# EAGLE board dog tracker rev1 (EAGLE 9.6.2)
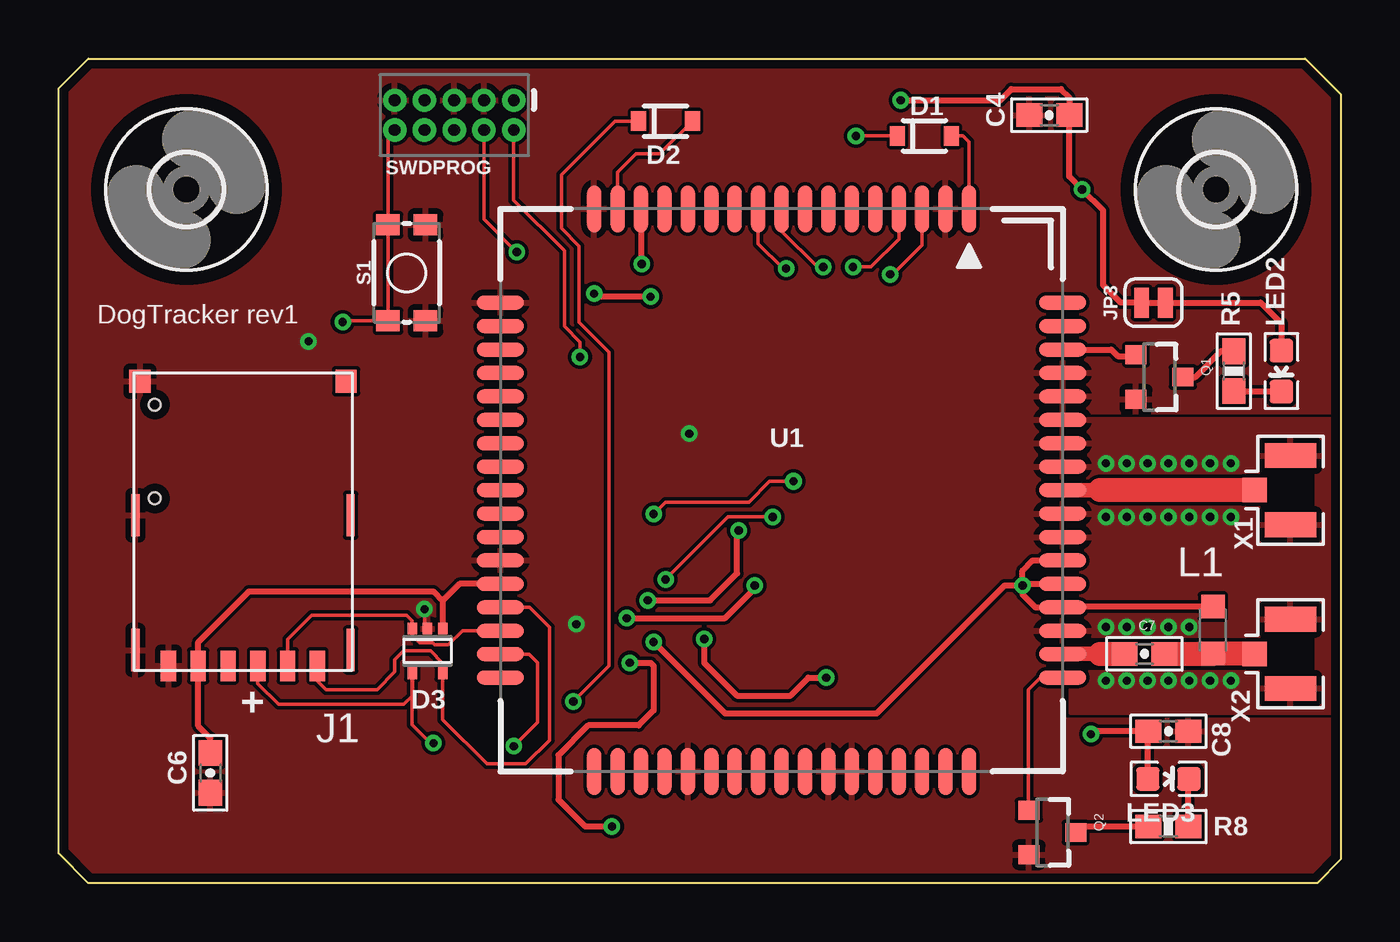
[diagram p0: board, top side]
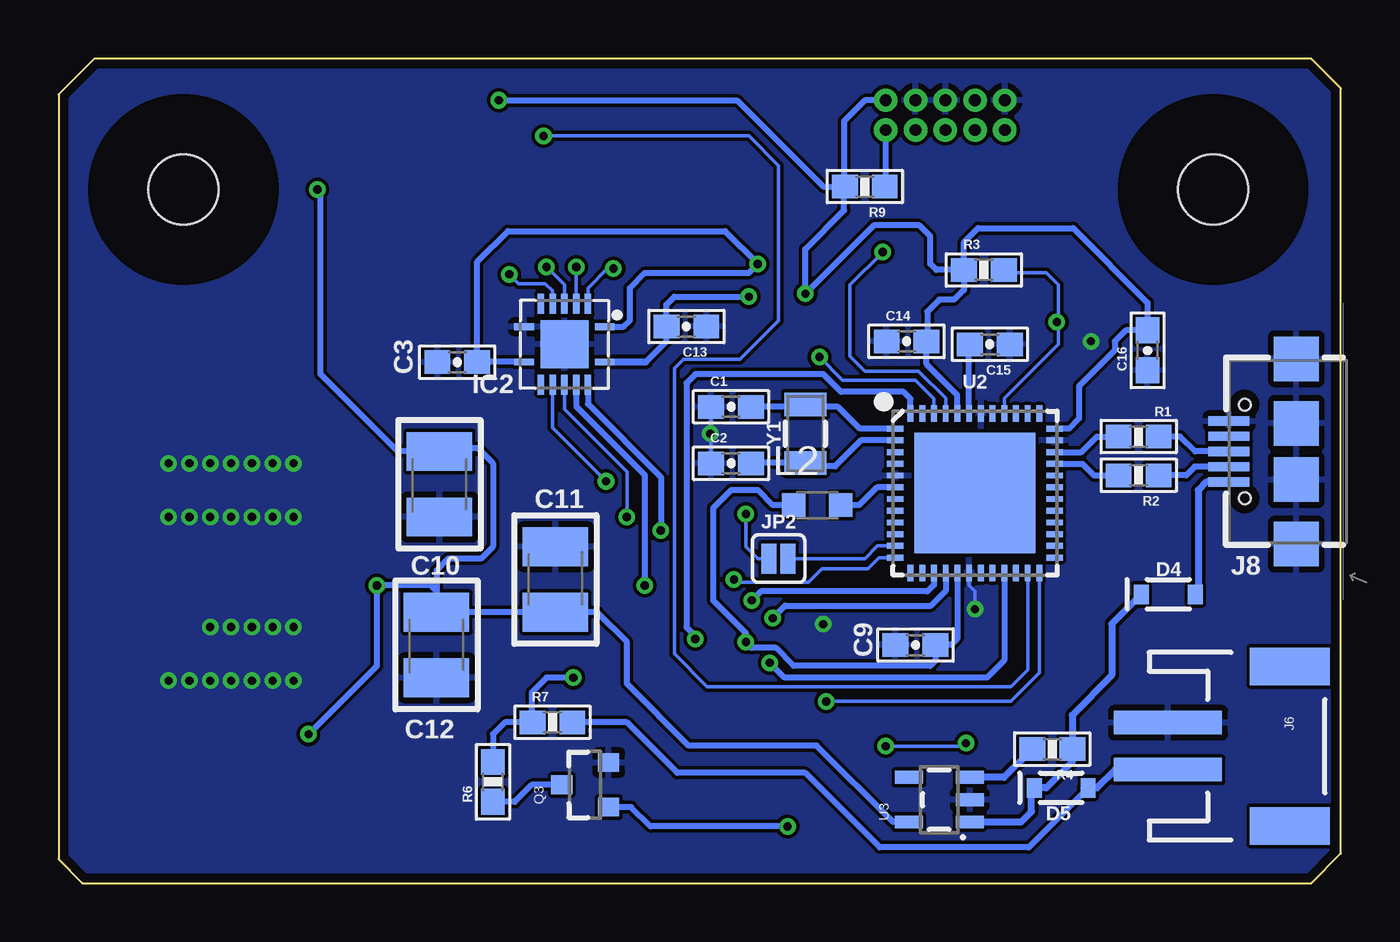
[diagram p1: board, bottom side, seen from below]

Size 54.74 x 35.18 mm. Coordinates in mm from the lower left corner, seen from the top.
Outline: 0,1.27 0,33.91 1.27,35.18 53.21,35.18 54.74,33.65 54.74,1.02 53.72,0 1.27,0 0,1.27
Copper layers (1*16): Top 0.0356mm / dielectric 1.5011mm / Bottom 0.0356mm
Design rules "oshpark-2layer *": minimum track width 6mil, minimum drill 13mil, track to track 6mil, track to pad 6mil, pad to pad 6mil, via to via 6mil, smd to smd 6mil, copper to edge 15mil, drill to drill 6mil, minimum pad ring 7mil, minimum via ring 7mil, stop-mask expansion 2.5mil, vias tented up to drill 0mil, thermal gap 10mil
Net classes: 1 power: width 0.406 mm

## Footprints (pad centres in the part's own frame; a part is rotated, then mirrored left to right if it is on the bottom)
0603-CAP-MARKED = smd 1.1 x 1: 1 -0.85,0; 2 0.85,0
1210 = smd 1.651 x 2.794: 1 -1.397,0; 2 1.397,0
SOD-323 = smd 0.63 x 0.83: A 1.15,0; C -1.15,0
SOT-353 = smd 0.4 x 0.5: 1 -0.65,-0.95; 2 0,-0.95; 3 0.65,-0.95; 4 0.65,0.95; 5 -0.65,0.95
3,0 = hole 3: 0,0
VQFN-14 = smd 0.85 x 0.28: 1 -1.725,-0.75; 7 1.725,-0.75; 8 1.725,0.75; 14 -1.725,0.75 | smd 0.28 x 0.85: 2 -1,-1.725; 3 -0.5,-1.725; 4 0,-1.725; 5 0.5,-1.725; 6 1,-1.725; 9 1,1.725; 10 0.5,1.725; 11 0,1.725; 12 -0.5,1.725; 13 -1,1.725 | smd 2.05 x 2.05: PAD 0,0
693043020611 = smd 0.65 x 1.3: C1 1.91,0; C2 -0.63,0; C3 -1.9,0; C5 3.18,0; C6 0.64,0; C7 -3.17,0 | smd 0.9 x 1: Z1 4.4,-12.14; Z6 -4.4,-12.14 | smd 0.35 x 1.8: Z2 4.595,-6.42; Z3 4.595,-0.67; Z4 -4.596,-0.67; Z5 -4.596,-6.42
JST-2-SMD = smd 1 x 4.6: 1 -1,-3.7; 2 1,-3.7 | smd 1.6 x 3.4: NC1 -3.4,1.5; NC2 3.4,1.5
USB-B-MICRO-SMD = smd 1.75 x 0.4: D+ 2.875,0; D- 2.875,0.65; GND 2.875,-1.3; ID 2.875,-0.65; VBUS 2.875,1.3 | smd 1.9 x 1.9: SHIELD1 0,3.95; SHIELD2 0,-3.95; SHIELD3 0,1.2; SHIELD4 0,-1.2 | hole 0.5: 2.2,2; 2.2,-2
SMT-JUMPER_2_NO_SILK = smd 0.635 x 1.27: 1 -0.406,0; 2 0.406,0
SMT-JUMPER_2_NC_TRACE_SILK = smd 0.635 x 1.27: 1 -0.508,0; 2 0.508,0
L2012C = smd 1 x 1: 1 -1,0; 2 1,0
LED-0603-MARKED = smd 1 x 1: A -0.877,0; C 0.877,0
SOT23-3 = smd 0.8 x 0.9: 1 -0.95,-1; 2 0.95,-1; 3 0,1
0603-RES-MARKED = smd 1.1 x 1: 1 -0.85,0; 2 0.85,0
TACTILE_SWITCH_SMD_4.6X2.8MM = smd 0.9 x 1: 1 -2.05,-0.8; 2 2.05,-0.8; 3 2.05,0.8; 4 -2.05,0.8
2X5-PTH-1.27MM = drill 0.508 pad 1: 1 -2.54,-0.635; 2 -2.54,0.635; 3 -1.27,-0.635; 4 -1.27,0.635; 5 0,-0.635; 6 0,0.635; 7 1.27,-0.635; 8 1.27,0.635; 9 2.54,-0.635; 10 2.54,0.635
SIM7000 = smd 2 x 0.6: 1 -12,8; 2 -12,7; 3 -12,6; 4 -12,5; 5 -12,4; 6 -12,3; 7 -12,2; 8 -12,1; 9 -12,0; 10 -12,-1; 11 -12,-2; 12 -12,-3; 13 -12,-4; 14 -12,-5; 15 -12,-6; 16 -12,-7; 17 -12,-8; 35 12,-8; 36 12,-7; 37 12,-6; 38 12,-5; 39 12,-4; 40 12,-3; 41 12,-2; 42 12,-1; 43 12,0; 44 12,1; 45 12,2; 46 12,3; 47 12,4; 48 12,5; 49 12,6; 50 12,7; 51 12,8 | smd 0.6 x 2: 18 -8,-12; 19 -7,-12; 20 -6,-12; 21 -5,-12; 22 -4,-12; 23 -3,-12; 24 -2,-12; 25 -1,-12; 26 0,-12; 27 1,-12; 28 2,-12; 29 3,-12; 30 4,-12; 31 5,-12; 32 6,-12; 33 7,-12; 34 8,-12; 52 8,12; 53 7,12; 54 6,12; 55 5,12; 56 4,12; 57 3,12; 58 2,12; 59 1,12; 60 0,12; 61 -1,12; 62 -2,12; 63 -3,12; 64 -4,12; 65 -5,12; 66 -6,12; 67 -7,12; 68 -8,12
QFN-48 = smd 0.7 x 0.25: 1 -3.4,2.75; 2 -3.4,2.25; 3 -3.4,1.75; 4 -3.4,1.25; 5 -3.4,0.75; 6 -3.4,0.25; 7 -3.4,-0.25; 8 -3.4,-0.75; 9 -3.4,-1.25; 10 -3.4,-1.75; 11 -3.4,-2.25; 12 -3.4,-2.75; 25 3.4,-2.75; 26 3.4,-2.25; 27 3.4,-1.75; 28 3.4,-1.25; 29 3.4,-0.75; 30 3.4,-0.25; 31 3.4,0.25; 32 3.4,0.75; 33 3.4,1.25; 34 3.4,1.75; 35 3.4,2.25; 36 3.4,2.75 | smd 0.25 x 0.7: 13 -2.75,-3.4; 14 -2.25,-3.4; 15 -1.75,-3.4; 16 -1.25,-3.4; 17 -0.75,-3.4; 18 -0.25,-3.4; 19 0.25,-3.4; 20 0.75,-3.4; 21 1.25,-3.4; 22 1.75,-3.4; 23 2.25,-3.4; 24 2.75,-3.4; 37 2.75,3.4; 38 2.25,3.4; 39 1.75,3.4; 40 1.25,3.4; 41 0.75,3.4; 42 0.25,3.4; 43 -0.25,3.4; 44 -0.75,3.4; 45 -1.25,3.4; 46 -1.75,3.4; 47 -2.25,3.4; 48 -2.75,3.4 | smd 5.15 x 5.15: EP 0,0
SOT23-5 = smd 0.55 x 1.2: 1 -0.95,-1.3; 2 0,-1.3; 3 0.95,-1.3; 4 0.95,1.3; 5 -0.95,1.3
U.FL = smd 2.2 x 1.05: 1 0,1.475; 2 0,-1.475 | smd 1.05 x 1.05: 3 1.525,0
CRYSTAL-SMD-3.2X1.5MM = smd 1 x 1.8: P$1 -1.25,0; P$2 1.25,0

## Placement (x,y rotation side)
C1  22pF  [0603-CAP-MARKED]  26.04,20.32 0 bottom
C2  22pF  [0603-CAP-MARKED]  26.04,17.91 0 bottom
C3  0.1uF  [0603-CAP-MARKED]  37.72,22.23 0 bottom
C4  0.1uF  [0603-CAP-MARKED]  42.29,32.77 180 top
C6  0.22uF  [0603-CAP-MARKED]  6.48,4.7 270 top
C7  33pF  [0603-CAP-MARKED]  46.35,9.78 180 top
C8  0.1uF  [0603-CAP-MARKED]  47.37,6.48 0 top
C9  1uF  [0603-CAP-MARKED]  18.16,10.16 180 bottom
C10  100uF  [1210]  38.48,17.02 270 bottom
C11  100uF  [1210]  33.53,12.95 90 bottom
C12  100uF  [1210]  38.61,10.16 270 bottom
C13  0.1uF  [0603-CAP-MARKED]  27.94,23.75 180 bottom
C14  0.1uF  [0603-CAP-MARKED]  18.54,23.11 0 bottom
C15  0.1uF  [0603-CAP-MARKED]  14.99,22.99 180 bottom
C16  0.1uF  [0603-CAP-MARKED]  8.25,22.73 90 bottom
D1  250mA/100V  [SOD-323]  36.96,31.88 0 top
D2  250mA/100V  [SOD-323]  25.91,32.51 0 top
D3  MSQA6V1W5T2G  [SOT-353]  15.75,9.91 180 top
D4  1A/23V/620mV  [SOD-323]  7.37,12.32 0 bottom
D5  1A/23V/620mV  [SOD-323]  11.94,4.06 0 bottom
H1  MOUNT-HOLE3.0  [3,0]  5.46,29.59 0 top
H2  MOUNT-HOLE3.0  [3,0]  49.4,29.59 0 top
IC2  TXB0104  [VQFN-14]  33.15,22.99 180 bottom
J1  [693043020611]  7.87,9.27 180 top
J6  LiPo  [JST-2-SMD]  3.68,5.84 270 bottom
J8  microUSB  [USB-B-MICRO-SMD]  1.91,18.42 180 bottom
JP2  [SMT-JUMPER_2_NO_SILK]  24,13.84 180 bottom
JP3  [SMT-JUMPER_2_NC_TRACE_SILK]  46.74,24.77 0 top
L1  27nh  [L2012C]  49.28,10.79 270 top
L2  27nh  [L2012C]  22.35,16.13 0 bottom
LED2  Green  [LED-0603-MARKED]  52.2,21.84 270 top
LED3  Blue  [LED-0603-MARKED]  47.37,4.45 0 top
Q1  BSS138L  [SOT23-3]  46.99,21.59 270 top
Q2  BSS138L  [SOT23-3]  42.42,2.16 270 top
Q3  BSS138L  [SOT23-3]  32.26,4.19 90 bottom
R1  22  [0603-RES-MARKED]  8.64,19.05 180 bottom
R2  22  [0603-RES-MARKED]  8.64,17.4 180 bottom
R3  10k  [0603-RES-MARKED]  15.24,26.16 0 bottom
R4  22  [0603-RES-MARKED]  12.32,5.71 180 bottom
R5  2k  [0603-RES-MARKED]  50.16,21.84 270 top
R6  30k  [0603-RES-MARKED]  36.2,4.32 90 bottom
R7  10k  [0603-RES-MARKED]  33.65,6.86 0 bottom
R8  470  [0603-RES-MARKED]  47.37,2.41 0 top
R9  10k  [0603-RES-MARKED]  20.32,29.72 180 bottom
S1  Reset  [TACTILE_SWITCH_SMD_4.6X2.8MM]  14.86,26.04 90 top
SWDPROG  CORTEX_DEBUG_PTH  [2X5-PTH-1.27MM]  16.89,32.77 180 top
U1  [SIM7000]  30.86,16.76 270 top
U2  ATSAMD21G-M  [QFN-48]  15.62,16.64 0 bottom
U3  3.3V  [SOT23-5]  17.14,3.56 90 bottom
X1  LTE-uFL  [U.FL]  52.58,16.76 180 top
X2  GNSS-uFL  [U.FL]  52.58,9.78 180 top
Y1  32.768kHz  [CRYSTAL-SMD-3.2X1.5MM]  22.86,19.18 90 bottom

## Library data of the parts
C1-C4 C6-C16 = TimWoo-Capacitors
D1 D2 = TimWoo-Diodes; PROD_ID: DIO-09646
D3 = TimWoo-Diodes
D4 D5 = SparkFun-DiscreteSemi; PROD_ID: DIO-11623
H1 H2 = holes
IC2 = TimWoo-IC
J1 = Wurth_Elektronik_Electromechanic_Input-Output_Connectors_rev16b
J6 = TimWoo-Connectors; PROD_ID: CONN-11443
J8 JP2 JP3 X1 X2 = TimWoo-Connectors
L1 L2 = rcl; SPICEPREFIX: L
LED2 LED3 = TimWoo-LED
Q1-Q3 = TimWoo-MOSFETs
R1-R9 = TimWoo-Resistors
S1 = SparkFun-Switches; PROD_ID: SWCH-13065
SWDPROG = SparkFun-Connectors
U1 = TimWoo-RF
U2 = SparkFun-IC-Microcontroller; PROD_ID: IC-13064
U3 = SparkFun-IC-Power; PROD_ID: VREG-12457
Y1 = SparkFun-Clocks; PROD_ID: XTAL-13062

## Nets
1.8V: C3.2 IC2.1 IC2.8 U1.15
3.3V: C4.1 C8.1 C9.1 C10.1 C11.1 C12.1 C13.2 C14.2 C16.2 IC2.14 JP3.1 L1.1 L2.1 LED3.A R3.1 R9.2 SWDPROG.1 U1.55 U1.56 U1.57 U2.17 U2.36 U2.44 U3.5
!RESET: R3.2 S1.3 S1.4 SWDPROG.10 U2.40
BATT_SENSE: R6.2 R7.1 U2.48
D+: J8.D+ R1.1
D-: J8.D- R2.1
GND: C1.1 C2.1 C3.1 C4.2 C6.2 C8.2 C9.2 C10.2 C11.2 C12.2 C13.1 C14.1 C15.1 C16.1 D3.2 IC2.7 IC2.PAD J1.C5 J1.Z1 J1.Z2 J1.Z3 J6.1 J8.GND J8.SHIELD1 J8.SHIELD2 J8.SHIELD3 J8.SHIELD4 Q1.2 Q2.2 Q3.2 S1.1 S1.2 SWDPROG.3 SWDPROG.5 SWDPROG.9 U1.2 U1.17 U1.18 U1.29 U1.39 U1.45 U1.46 U1.54 U1.58 U1.59 U1.61 U1.62 U1.63 U1.64 U1.65 U2.5 U2.18 U2.35 U2.42 U3.2 X1.1 X1.2 X2.1 X2.2
LTE_DTR: IC2.5 U1.3
LTE_PWR: D1.C U2.23
LTE_RI: IC2.4 U1.4
LTE_RST: D2.C U2.24
LTE_RXD: IC2.2 U1.10
LTE_TXD: IC2.3 U1.9
N$1: C7.2 U1.53
N$2: D1.A U1.1
N$3: C7.1 L1.2 X2.3
N$4: Q1.3 R5.1
N$5: LED2.C R5.2
N$6: C2.2 U2.2 Y1.P$1
N$7: C1.2 U2.1 Y1.P$2
N$8: JP2.1 U2.11
N$9: R2.2 U2.33
N$10: Q2.3 R8.1
N$11: LED3.C R8.2
N$12: JP3.2 LED2.A
N$13: R1.2 U2.34
N$15: Q3.3 R6.1
N$16: C15.2 U2.43
N$17: R4.2 U3.3
N$19: D4.C D5.C R4.1 U3.1
N$20: SWDPROG.7
N$24: SWDPROG.6
N$25: SWDPROG.8
NETLIGHT: Q2.1 U1.52
NRESET: D2.A U1.16
PWR_STAT: Q1.1 U1.66
RF_ANT: U1.60 X1.3
SCL: U2.32
SDA: U2.31
SENSE_GATE: Q3.1 U2.21
SIM_CLK: D3.3 J1.C3 U1.32
SIM_DATA: D3.5 J1.C7 U1.31
SIM_RST: D3.4 J1.C2 U1.33
SIM_VCC: C6.1 D3.1 J1.C1 U1.30
SWCLK: SWDPROG.4 U2.45
SWDIO: R9.1 SWDPROG.2 U2.46
UC_DTR: IC2.10 JP2.2
UC_RI: IC2.11 U2.12
UC_RXD: IC2.12 U2.16
UC_TXD: IC2.13 U2.15
V_BATT: D5.A J6.2 R7.2
V_USB: D4.A J8.VBUS
VDDANA: L2.2 U2.6

## Tracks (layer width: path | path; a pad name or v marks a point on that pad's centre or on a via)
1.8V  (via drill 0.35)
  Top 0.152: 24.89,28.73 U1.15
  Top 0.254: v24.89,26.42 24.89,28.73
  Bottom 0.152: 36.86,22.24 C3.2
  Bottom 0.254: IC2.1 30.62,23.74 30.35,24 30.35,25.4 29.72,26.04 25.27,26.04 v24.89,26.42 26.29,27.81 35.56,27.81 36.87,26.5 C3.2 | IC2.8 36.86,22.24
3.3V  (via drill 0.35)
  Top 0.152: 46.49,6.45 C8.1 | v41.15,12.7 41.21,12.76 | 42.89,11.79 U1.55 | 44.07,6.48 v44.07,6.35
  Top 0.254: LED3.A 46.49,6.45 | 41.21,12.76 U1.56 | v41.15,12.7 41.15,12.32 41.7,11.76 U1.55 | v41.15,12.7 41.15,13.33 41.58,13.76 U1.57 | v25.27,25.02 22.99,25.02 v22.86,25.15 | v41.15,12.7 40.39,12.7 34.92,7.24 28.45,7.24 v25.4,10.29 | v35.94,33.4 40.2,33.4 40.67,33.88 42.79,33.88 43.14,33.53 C4.1 43.14,30.14 v43.69,29.59 44.58,28.7 44.58,25.53 45.34,24.77 JP3.1 | L1.1 42.89,11.79 | C8.1 44.07,6.48
  Bottom 0.152: 38.61,12.45 C12.1 38.48,11.56 38.61,11.68 | 38.35,18.54 C10.1 | 17.53,23.28 17.55,23.26 C14.2 17.65,23.11 | 22.86,25.27 v22.86,25.15
  Bottom 0.254: 29.67,22.24 28.79,23.11 C13.2 28.79,24.68 28.45,25.02 v25.27,25.02 | U2.17 16.37,10.43 16.64,10.16 C9.1 | U2.44 16.37,20.82 17.69,22.14 C14.2 | 38.48,11.56 C11.1 31.75,11.56 30.48,10.29 30.48,8.51 27.84,5.87 22.38,5.87 19.12,2.61 U3.5 | 38.61,12.45 38.86,12.7 v41.15,12.7 41.15,9.27 v44.07,6.35 | 38.35,18.54 36.83,18.54 36.2,17.91 36.2,14.35 36.7,13.84 38.1,13.84 38.61,13.33 38.61,11.68 | C9.1 17.31,10.29 | C10.1 40.26,18.42 43.56,21.72 43.56,29.46 v43.69,29.59 | R3.1 16.09,27.34 15.49,27.94 11.43,27.94 8.25,24.77 C16.2 9.18,23.58 9.65,23.11 9.65,22.73 11.18,21.2 11.18,19.81 11.6,19.39 U2.36 | R3.1 17.27,26.16 17.53,26.42 17.53,27.6 18,28.07 19.94,28.07 v22.86,25.15 22.86,27.05 21.21,28.7 21.21,29.76 | R3.1 16.09,25.31 16.51,24.89 17.14,24.89 17.65,24.38 17.65,23.37 17.55,23.26 | L2.1 24.26,16.13 24.89,16.76 26.04,16.76 26.8,16 26.8,12.06 25.4,10.67 v25.4,10.29 25.14,10.03 24.12,10.03 23.36,9.27 17.53,9.27 17.31,9.49 C9.1 | 21.21,29.76 R9.2 | SWDPROG.1 20.32,33.4 21.21,32.51 21.21,29.76 | v35.94,33.4 25.78,33.4 22.1,29.72 21.25,29.72 21.21,29.76
  Bottom 0.305: IC2.14 29.67,22.24
!RESET  (via drill 0.35)
  Top 0.152: v12.13,23.94 12.17,23.98 S1.4 S1.3 14.06,32.13 SWDPROG.10
  Bottom 0.152: U2.40 14.37,20.68 12.06,22.99 12.06,23.88 | 12.06,23.88 v12.13,23.94 | R3.2 14.26,26.04 12.57,26.04 12.06,25.53 12.06,23.88
BATT_SENSE  (via drill 0.35)
  Top 0.254: v27.56,10.41 27.56,9.4 28.96,8 31.24,8 32,8.76 v32.77,8.76
  Bottom 0.254: R6.2 36.2,6.35 35.69,6.86 R7.1 34.54,6.9 34.54,8.13 33.91,8.76 v32.77,8.76 | U2.48 18.37,20.66 18.67,20.96 21.34,20.96 22.1,21.72 27.56,21.72 27.94,21.34 27.94,10.92 27.56,10.54 v27.56,10.41
D+
  Bottom 0.254: J8.D+ 6.22,18.42 6.86,19.05 R1.1
D-
  Bottom 0.254: J8.D- 6.24,17.77 6.6,17.4 R2.1
GND  (via drill 0.35)
  Top 0.152: D3.2 15.62,10.98 v15.62,11.68
  Bottom 0.152: v15.62,11.68 15.62,12.45 15.87,12.7 U2.18 | C2.1 C1.1
  other vias: 10.67,23.11 44.7,10.92 45.59,10.92 46.48,10.92 47.37,10.92 48.26,10.92 44.7,8.64 45.59,8.64 46.48,8.64 47.37,8.64 48.26,8.64 49.15,8.64 50.04,8.64 44.7,15.62 45.59,15.62 46.48,15.62 47.37,15.62 48.26,15.62 49.15,15.62 50.04,15.62 44.7,17.91 45.59,17.91 46.48,17.91 47.37,17.91 48.26,17.91 49.15,17.91 50.04,17.91 22.1,11.05 26.92,19.18
  pour Top: -0.13,-0.13 -0.13,35.31 47.84,35.31 53.43,35.09 54.75,33.77 54.75,20.07 42.8,20.07 42.8,6.99 54.74,6.99 54.74,-0.13
  pour Bottom: -0.76,-0.13 -0.76,35.43 54.48,35.43 56.9,33.02 56.9,-0.13
  pour Top (isolate 0.152): 54.74,19.81 43.05,19.81 43.05,10.54 51.69,10.54 51.69,9.02 43.18,9.02 43.18,7.24 54.74,7.24
LTE_DTR  (via drill 0.35)
  Top 0.152: U1.3 36.86,27.21 35.56,25.91 v35.5,25.97
  Bottom 0.152: v35.5,25.97 35.11,25.58 33.96,25.58 33.65,25.27 IC2.5
LTE_PWR  (via drill 0.35)
  Top 0.152: v34.04,31.88 D1.C
  Bottom 0.152: U2.23 13.37,9.11 14.1,8.38 27.05,8.38 28.45,9.78 28.45,21.97 28.07,22.35 25.65,22.35 24,24 24,30.61 25.27,31.88 v34.04,31.88
LTE_RI  (via drill 0.35)
  Top 0.152: U1.4 35.86,27.48 34.67,26.29 v33.91,26.29
  Bottom 0.152: v33.91,26.29 33.15,25.53 IC2.4
LTE_RST  (via drill 0.35)
  Top 0.152: D2.C 23.74,32.51 21.46,30.23 21.46,27.94 22.23,27.18 22.23,23.93 23.5,22.66 23.5,9.27 v21.97,7.75
  Bottom 0.152: U2.24 12.87,8.97 14.1,7.75 v21.97,7.75
LTE_RXD  (via drill 0.35)
  Top 0.152: U1.10 29.86,27.29 30.93,26.23 v31.05,26.23
  Bottom 0.152: v31.05,26.23 31.31,26.23 32.15,25.38 IC2.2
LTE_TXD  (via drill 0.35)
  Top 0.152: U1.9 30.86,27.81 32.38,26.29 v32.64,26.29
  Bottom 0.152: v32.64,26.29 IC2.3
N$1
  Top 0.152: 45.49,9.76 C7.2
  Top 0.61: U1.53 42.86,9.78 44.45,9.78
  Top 1.016: 44.45,9.78 C7.2
N$2
  Top 0.152: D1.A 38.61,31.88 38.86,31.62 U1.1
N$3
  Top 0.152: 49.26,9.78 L1.2 | 51.04,9.79 X2.3
  Top 1.016: X2.3 49.28,9.78 | 49.28,9.78 L1.2 | C7.1 49.28,9.78
N$4
  Top 0.254: Q1.3 48.51,21.59 49.62,22.69 R5.1
N$5
  Top 0.152: 52.17,20.99 LED2.C
  Top 0.254: R5.2 52.17,20.99
N$6
  Bottom 0.152: 22.71,17.78 Y1.P$1 | 25.17,17.93 C2.2
  Bottom 0.254: U2.2 20.48,18.89 21.59,17.78 22.71,17.78 | Y1.P$1 25.17,17.93
N$7
  Bottom 0.152: 22.75,20.32 Y1.P$2 22.97,20.32
  Bottom 0.254: U2.1 20.53,19.39 21.46,20.32 22.75,20.32 | 22.97,20.32 C1.2
N$8
  Bottom 0.152: U2.11 19.78,14.39 20.32,13.84 JP2.1
N$9
  Bottom 0.254: U2.33 11.03,17.89 10.54,17.4 R2.2
N$10
  Top 0.152: Q2.3 43.56,2.16 43.81,2.41
  Top 0.254: 43.81,2.41 R8.1
N$11
  Top 0.152: R8.2 48.25,2.44 | 48.22,4.42 LED3.C
  Top 0.254: R8.2 48.22,4.42
N$12
  Top 0.254: JP3.2 51.31,24.77 52.2,23.88 LED2.A
N$13
  Bottom 0.254: U2.34 11.08,18.39 10.41,19.05 R1.2
N$15
  Bottom 0.254: Q3.3 34.54,4.19 35.27,3.47 R6.1
N$16
  Bottom 0.152: 15.87,22.95 C15.2
  Bottom 0.254: U2.43 15.87,22.95
N$17
  Bottom 0.305: R4.2 14.38,4.51 U3.3
N$19
  Bottom 0.305: D4.C 9.78,11.06 9.78,8.86 11.47,7.17 R4.1 11.47,5.17 12.58,4.06 D5.C | U3.1 13.65,2.61 13.21,3.05 13.21,4.06 D5.C | D5.C
NETLIGHT
  Top 0.152: U1.52 41.91,8.76 41.4,8.25 41.4,3.12 Q2.1
NRESET
  Top 0.152: D2.A 25.66,31.12 24.64,31.12 23.86,30.33 U1.16
PWR_STAT
  Top 0.152: 45.93,22.48 Q1.1
  Top 0.254: U1.66 44.93,22.76 45.21,22.48 45.93,22.48
RF_ANT
  Top 0.61: 44.45,16.76 U1.60
  Top 1.016: X1.3 44.45,16.76
SENSE_GATE  (via drill 0.35)
  Top 0.254: v24.38,9.4 25.27,9.4 25.4,9.27 25.4,7.37 24.77,6.73 22.61,6.73 21.34,5.46 21.34,3.56 22.48,2.41 v23.62,2.41
  Bottom 0.254: U2.21 14.37,9.5 15.11,8.76 23.75,8.76 v24.38,9.4 | v23.62,2.41 29.46,2.41 30.29,3.24 Q3.1
SIM_CLK
  Top 0.152: J1.C3 9.77,10.41 10.79,11.43 14.86,11.43 15.1,11.19 D3.3 15.1,10.56 15.4,10.25 15.96,10.25 16.05,10.16 16.64,10.16 17.24,10.76 U1.32
SIM_DATA
  Top 0.152: J1.C7 11.04,8.64 11.42,8.25 13.59,8.25 14.35,9.02 14.35,9.52 14.73,9.91 15.87,9.91 16.4,9.38 D3.5 16.4,6.97 18.29,5.08 19.94,5.08 20.96,6.1 20.96,10.92 20.11,11.76 U1.31
SIM_RST  (via drill 0.35)
  Top 0.152: J1.C2 8.5,8.51 9.4,7.62 14.73,7.62 15.11,8 15.11,8.94 D3.4 15.1,6.75 15.87,5.97 v16,5.97 | v19.43,5.84 20.45,6.86 20.45,9.4 20.08,9.76 U1.33 18.88,9.78
  Bottom 0.152: v19.43,5.84 16.13,5.84 v16,5.97
SIM_VCC
  Top 0.254: 16.4,12.05 D3.1 | 16.4,12.05 16,12.45 8.13,12.45 5.96,10.28 J1.C1 5.96,6.7 6.48,6.18 C6.1 | U1.30 17.11,12.76 16.4,12.05
SWCLK  (via drill 0.35)
  Top 0.152: SWDPROG.4 18.16,28.32 v19.56,26.92
  Bottom 0.152: U2.45 16.87,20.68 18.03,21.84 20.32,21.84 20.96,22.48 20.96,25.53 v19.56,26.92
SWDIO  (via drill 0.35)
  Top 0.152: SWDPROG.2 19.43,29.13 21.59,26.97 21.59,23.75 22.26,23.08 v22.26,22.45
  Bottom 0.152: v22.26,22.45 21.27,21.46 18.16,21.46 17.37,20.67 U2.46
  Bottom 0.254: R9.1 19.43,29.76 SWDPROG.2
UC_DTR  (via drill 0.35)
  Top 0.152: v31.37,17.14 30.35,17.14 29.46,16.26 25.91,16.26 v25.4,15.75
  Bottom 0.152: IC2.10 33.65,19.42 v31.37,17.14 | v25.4,15.75 25.4,14.35 24.89,13.84 JP2.2
UC_RI  (via drill 0.35)
  Top 0.152: v30.48,15.62 28.58,15.62 v25.91,12.95
  Bottom 0.152: IC2.11 33.14,20.21 30.48,17.55 v30.48,15.62 | v25.91,12.95 25.78,12.83 22.73,12.83 22.15,13.41 20.19,13.41 19.72,13.89 U2.12
UC_RXD  (via drill 0.35)
  Top 0.254: v24.26,11.3 28.45,11.3 29.72,12.57 v29.72,12.7
  Bottom 0.152: IC2.12
  Bottom 0.254: U2.16 16.87,12.47 17.5,11.84 23.72,11.84 v24.26,11.3 | IC2.12 32.65,20.35 29.72,17.42 v29.72,12.7
UC_TXD  (via drill 0.35)
  Top 0.254: v25.15,12.06 27.81,12.06 28.96,13.21 28.96,13.22 28.96,13.21 28.96,14.97 v29.03,15.04
  Bottom 0.254: U2.15 17.37,12.73 17.65,12.45 24.77,12.45 v25.15,12.06 | v29.03,15.04 29.03,17.33 32.15,20.44 IC2.13
V_BATT
  Bottom 0.152: D5.A 11.05,4.06
  Bottom 0.254: D5.A 13.33,1.52 19.69,1.52 22.86,4.7 28.32,4.7 30.48,6.86 R7.2
  Bottom 0.305: J6.2 9.64,4.84 10.41,4.06 D5.A
V_USB
  Bottom 0.254: J8.VBUS 4.81,17.14
  Bottom 0.305: J8.VBUS 5.75,17.12 6.1,16.76 6.1,12.44 D4.A
VDDANA
  Bottom 0.254: U2.6 19.82,16.89 20.57,16.13 L2.2

## Text on the board
tPlace: +
tNames: DogTracker rev1